# Altium PCB SBTech_IcarusBoard_1V0.PcbDoc (part 1 of 2)
Units mm, origin at the board's own origin, x right, y up, seen from the top; angles counter-clockwise.
Board outline 76.5 x 109.5 mm, 4 copper layers (Component Side, Ground Plane, Power Plane, Solder Side), stack 0.844 mm thick; 136 components, 92 nets, 463 pads, 332 vias.
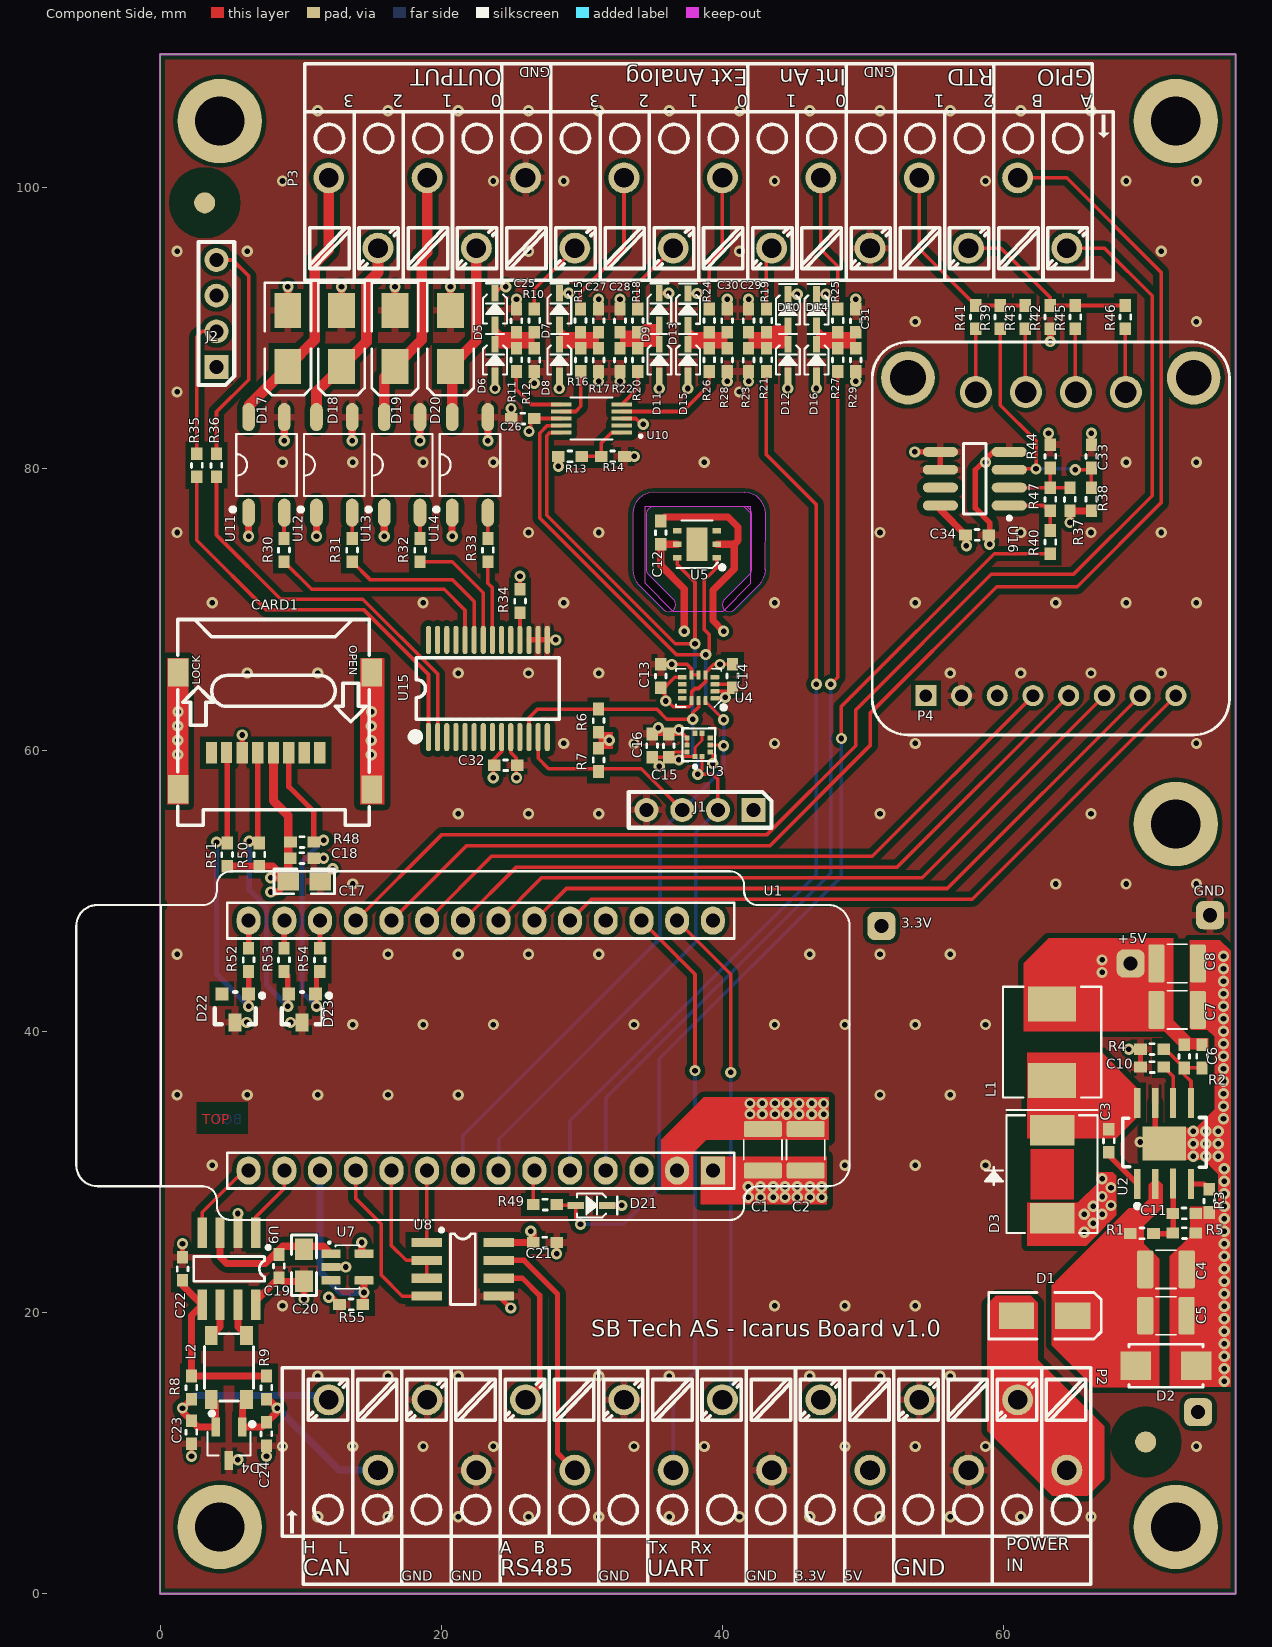
[diagram p0: Component Side view]
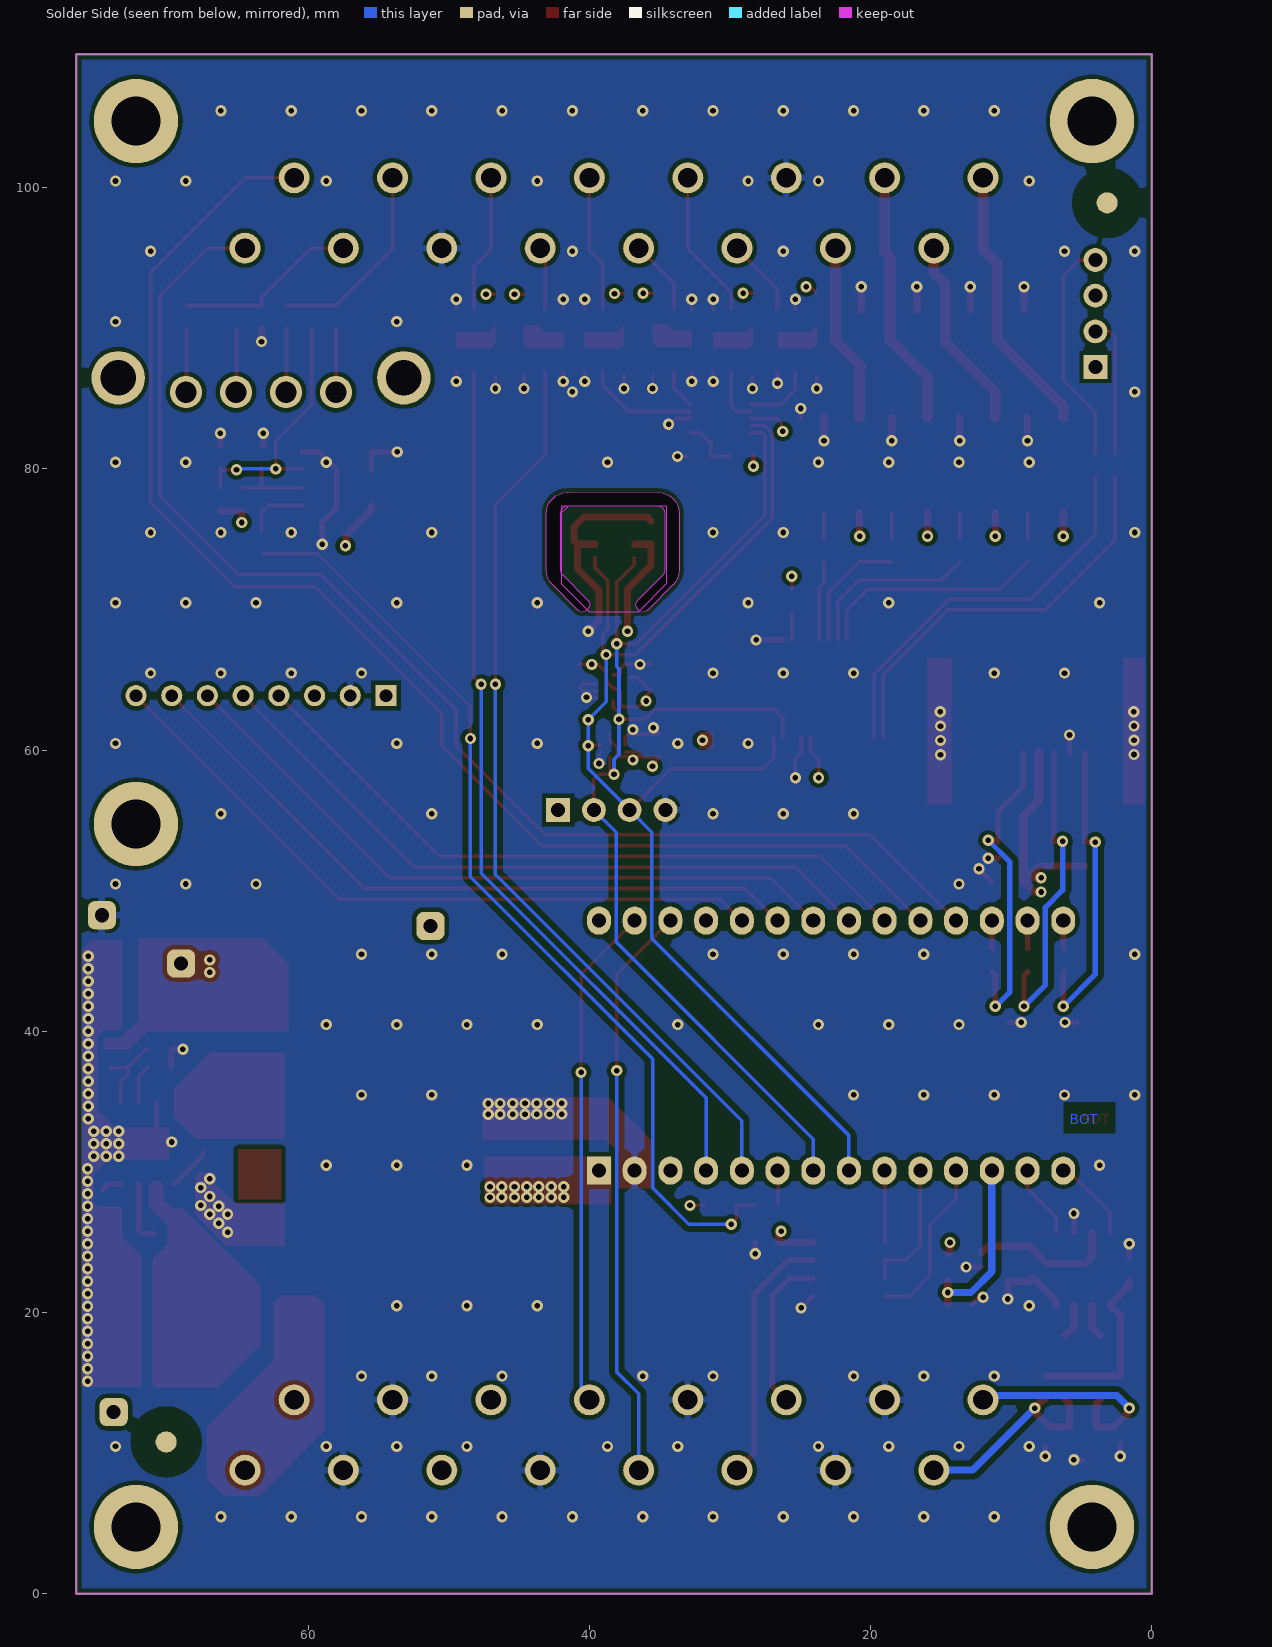
[diagram p1: Solder Side view, seen from below]
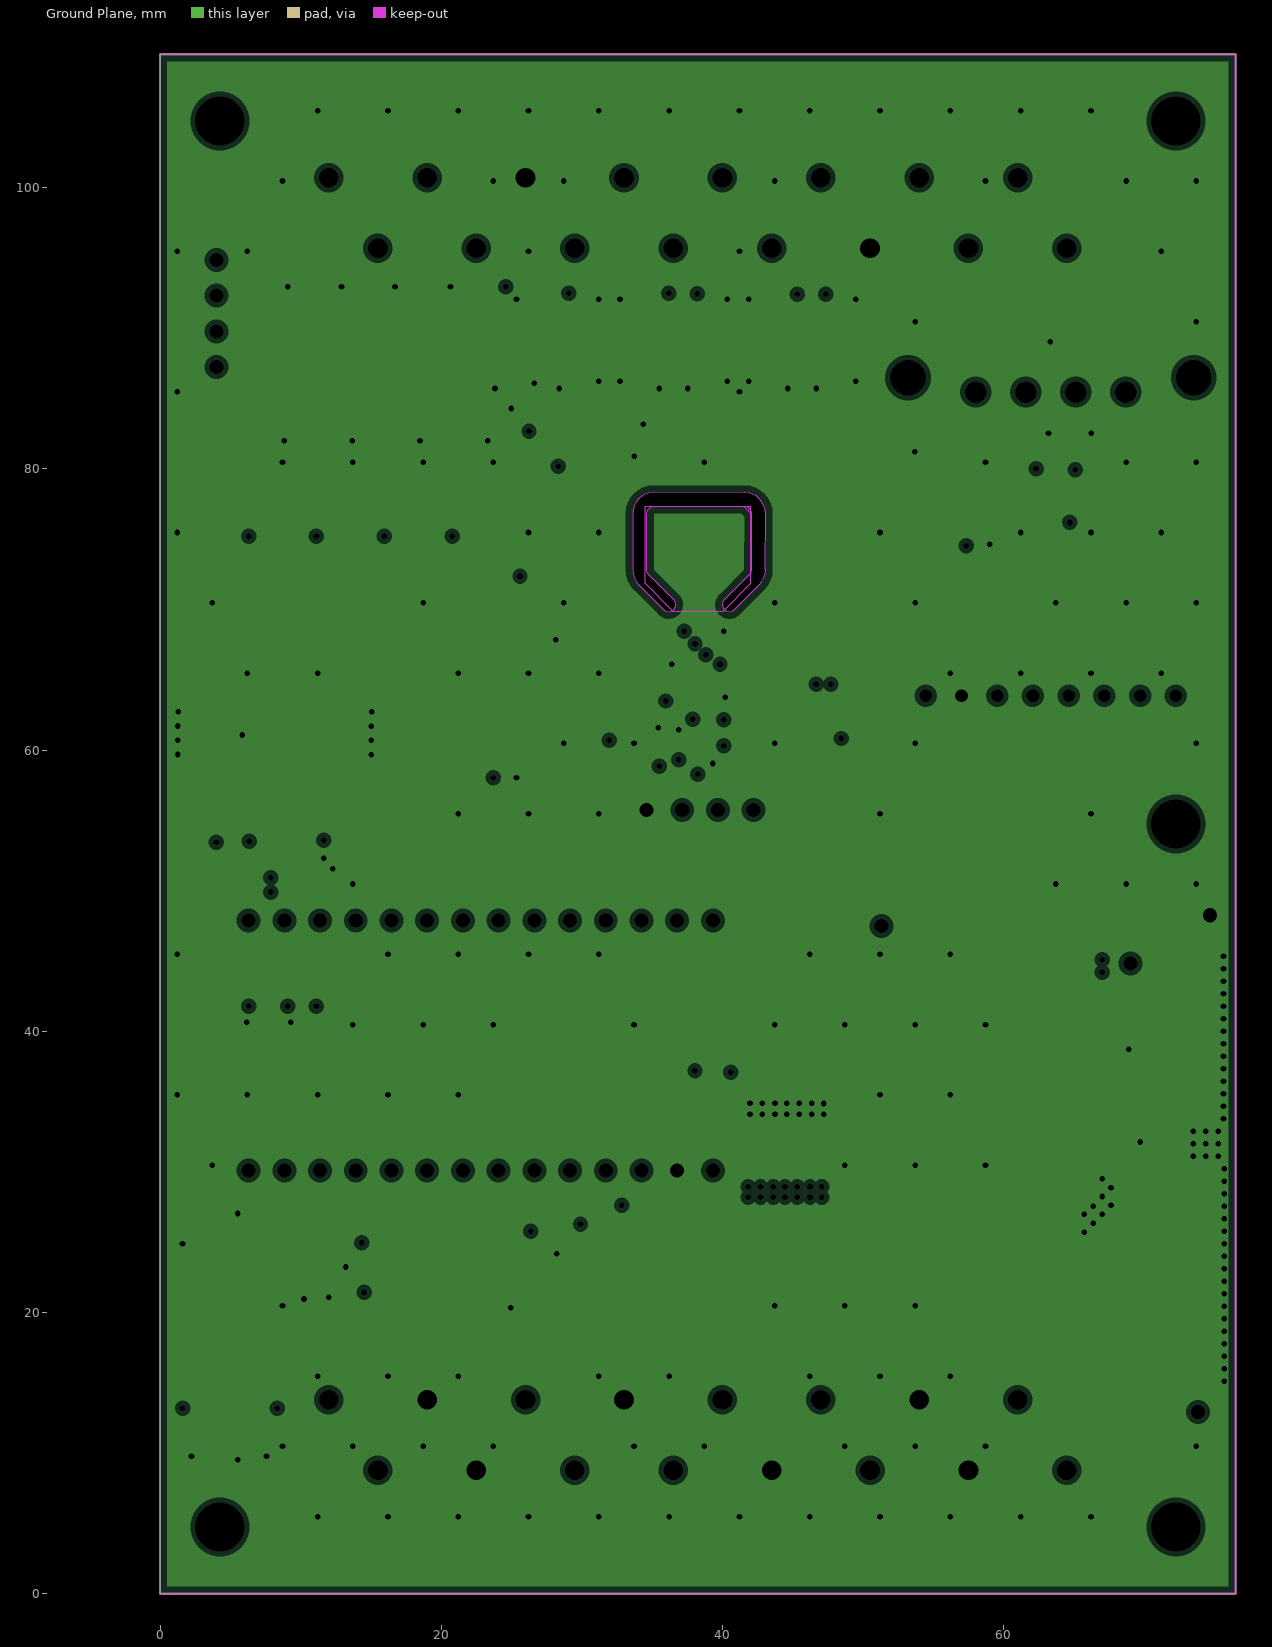
[diagram p2: Ground Plane, clearances drawn from the general rule]
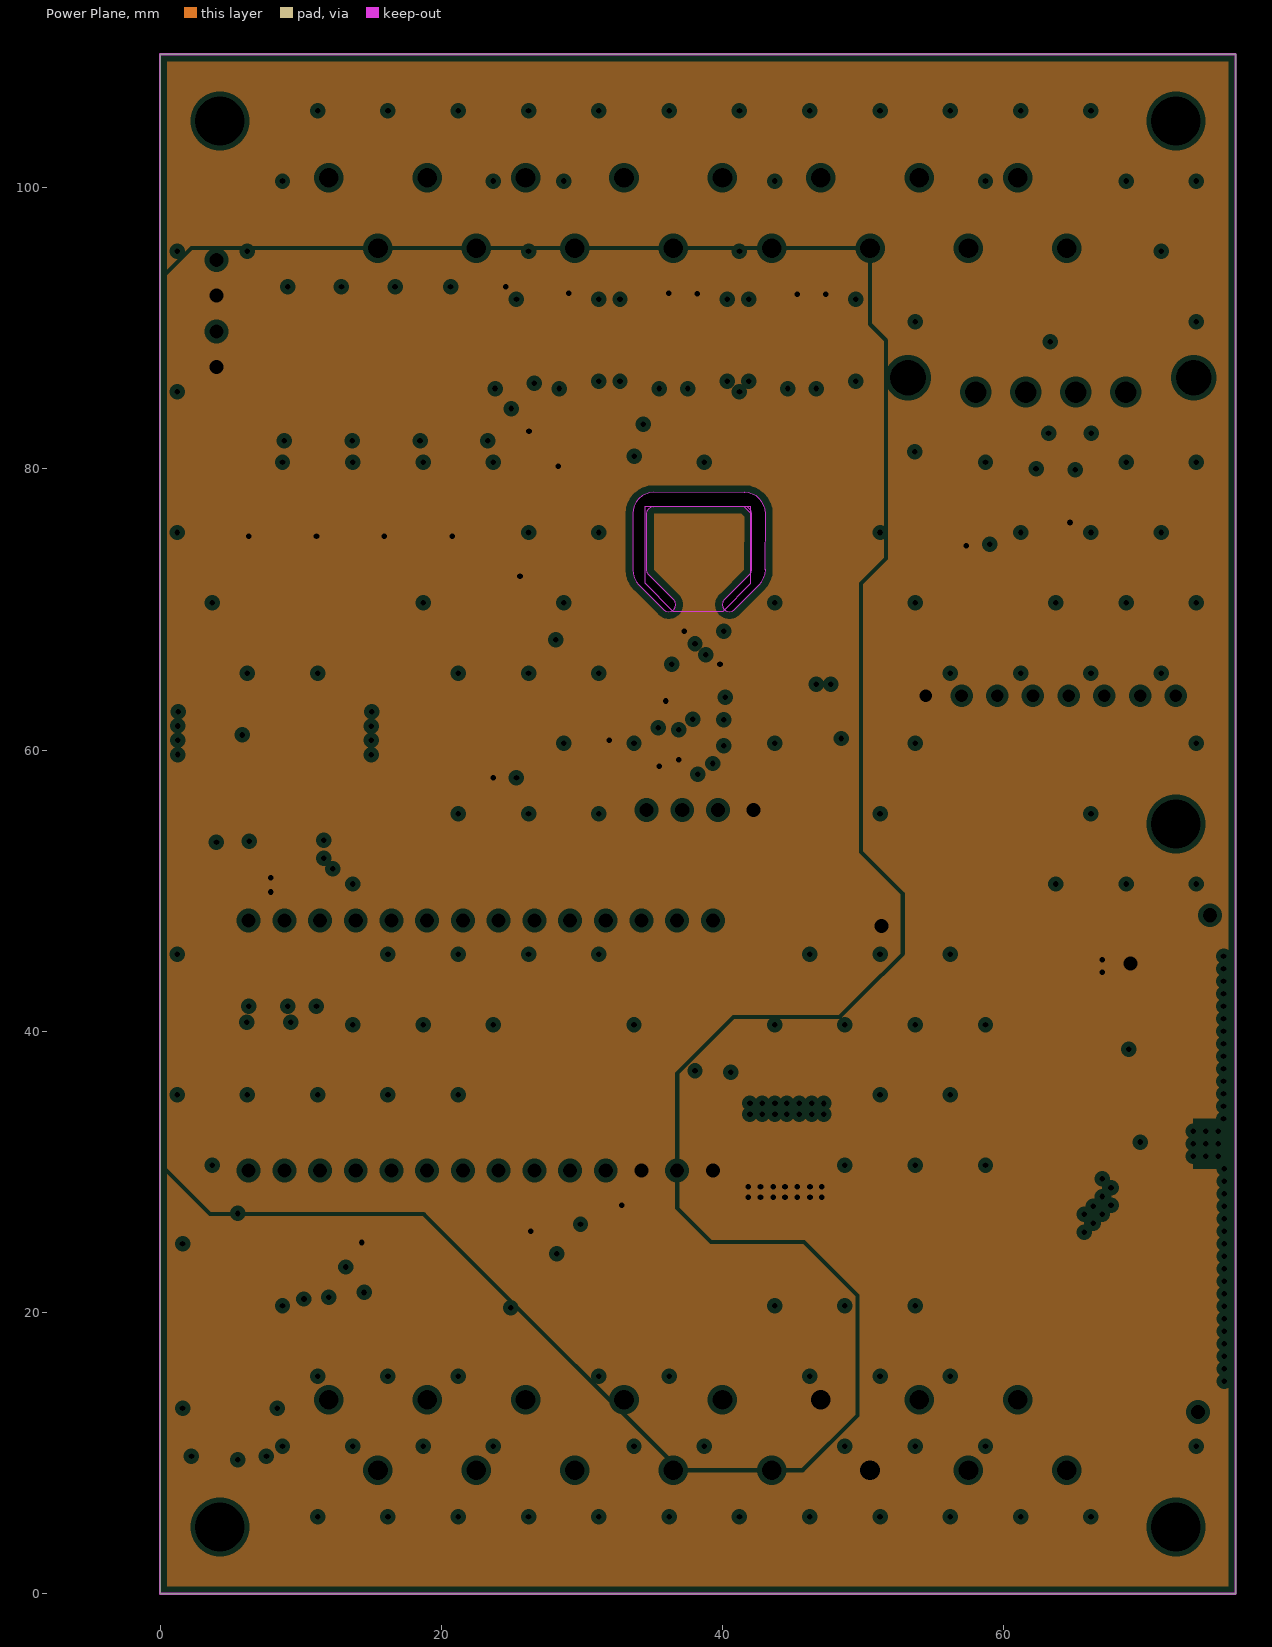
[diagram p3: Power Plane, clearances drawn from the general rule]
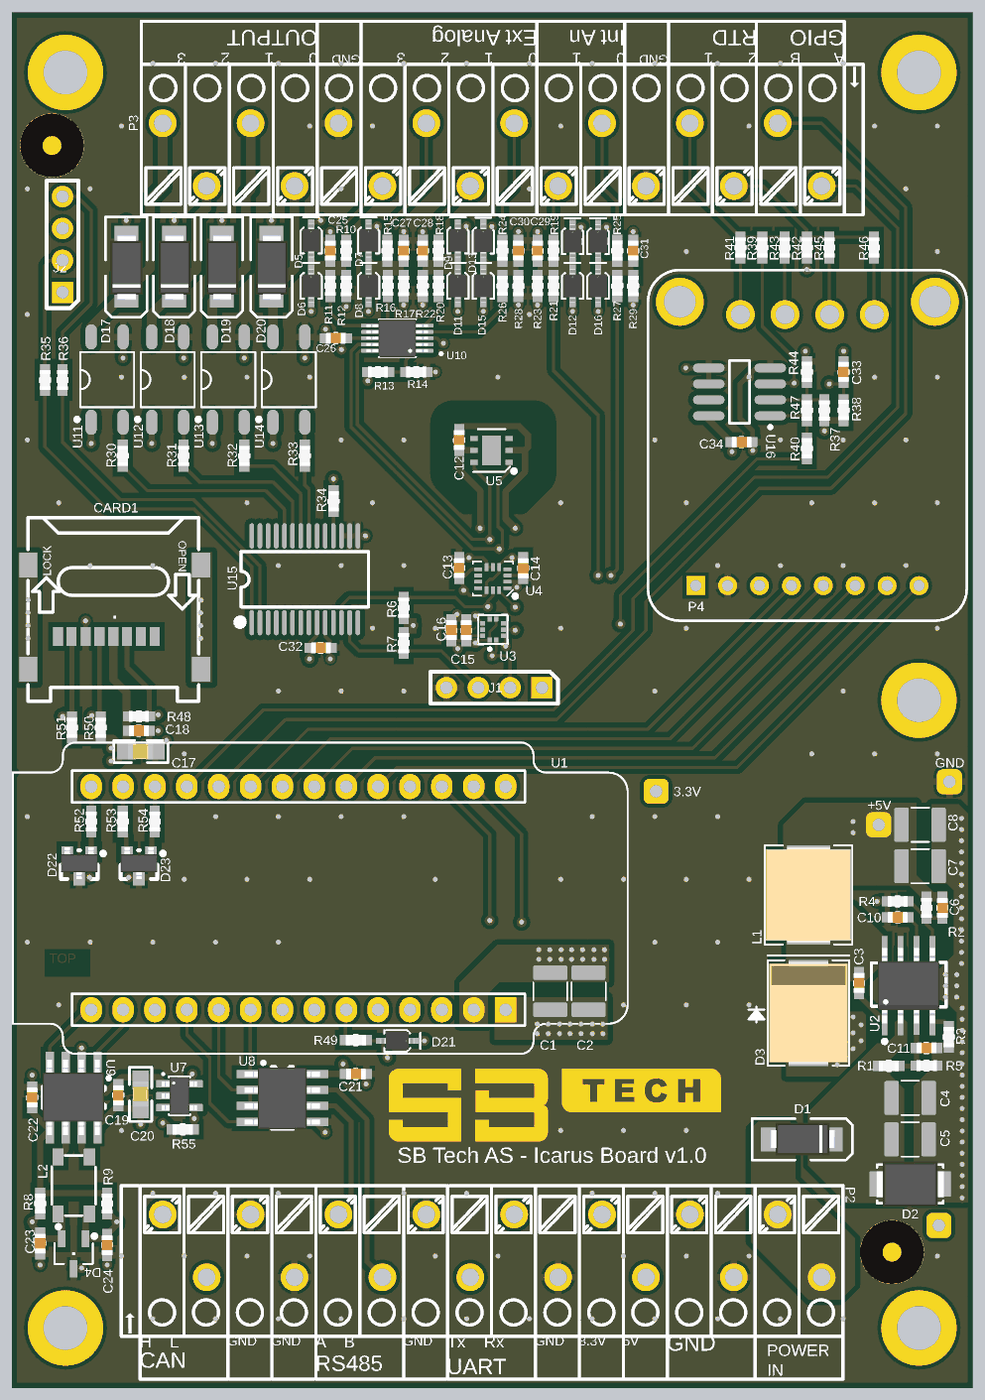
[diagram p5: 3D render of the assembled board from above, using the file's embedded part models]

## Layer stack, top to bottom
Top Solder: solder mask 0.0102, Solder Resist, Dk 3.5
Component Side: signal copper 0.0356
Dielectric 1: core 0.32, FR-4, Dk 4.8
Ground Plane: plane copper 0.036, net GND
Dielectric 3: prepreg 0.127, Dk 4.2
Power Plane: plane copper 0.036, net (Multiple Nets)
Dielectric 4: core 0.254, Dk 4.2
Solder Side: signal copper 0.0356
Bottom Solder: solder mask 0.0102, Solder Resist, Dk 3.5

## Board outline
0,0 0,109.5 76.5,109.5 76.5,0
cut-out: 41.558,77.337 41.753,77.298 41.919,77.187 42.029,77.022 42.068,76.827 42.058,72.827 42.068,72.827 42.029,72.632 41.919,72.466 41.912,72.473 40.144,70.705 40.137,70.712 40.027,70.547 39.988,70.352 40.027,70.157 40.137,69.991 40.302,69.881 40.498,69.842 40.693,69.881 40.858,69.991 42.619,71.766 42.624,71.761 42.811,71.989 42.951,72.25 43.037,72.533 43.065,72.827 43.058,72.827 43.065,76.827 43.037,77.121 42.951,77.404 42.811,77.664 42.624,77.893 42.396,78.08 42.135,78.219 41.852,78.305 41.558,78.334 41.558,78.327 35.119,78.334 34.825,78.305 34.542,78.219 34.282,78.08 34.053,77.893 33.866,77.664 33.726,77.403 33.641,77.121 33.612,76.827 33.619,76.827 33.619,72.827 33.612,72.827 33.641,72.533 33.726,72.25 33.866,71.989 34.053,71.761 34.058,71.766 35.826,69.998 35.819,69.991 35.984,69.881 36.18,69.842 36.375,69.881 36.54,69.991 36.651,70.157 36.689,70.352 36.651,70.547 36.54,70.712 36.533,70.705 34.765,72.473 34.758,72.466 34.648,72.632 34.609,72.827 34.619,72.827 34.619,76.827 34.609,76.827 34.648,77.022 34.758,77.187 34.924,77.298 35.119,77.337 35.119,77.327 41.558,77.337 41.753,77.298 41.919,77.187 42.029,77.022 42.068,76.827 41.558,77.327
cut-out: 41.558,77.337 41.753,77.298 41.919,77.187 42.029,77.022 42.068,76.827 42.058,72.827 42.068,72.827 42.029,72.632 41.919,72.466 41.912,72.473 40.144,70.705 40.137,70.712 40.027,70.547 39.988,70.352 40.027,70.157 40.137,69.991 40.302,69.881 40.498,69.842 40.693,69.881 40.858,69.991 42.619,71.766 42.624,71.761 42.811,71.989 42.951,72.25 43.037,72.533 43.065,72.827 43.058,72.827 43.065,76.827 43.037,77.121 42.951,77.404 42.811,77.664 42.624,77.893 42.396,78.08 42.135,78.219 41.852,78.305 41.558,78.334 41.558,78.327 35.119,78.334 34.825,78.305 34.542,78.219 34.282,78.08 34.053,77.893 33.866,77.664 33.726,77.403 33.641,77.121 33.612,76.827 33.619,76.827 33.619,72.827 33.612,72.827 33.641,72.533 33.726,72.25 33.866,71.989 34.053,71.761 34.058,71.766 35.826,69.998 35.819,69.991 35.984,69.881 36.18,69.842 36.375,69.881 36.54,69.991 36.651,70.157 36.689,70.352 36.651,70.547 36.54,70.712 36.533,70.705 34.765,72.473 34.758,72.466 34.648,72.632 34.609,72.827 34.619,72.827 34.619,76.827 34.609,76.827 34.648,77.022 34.758,77.187 34.924,77.298 35.119,77.337 35.119,77.327 41.558,77.337 41.753,77.298 41.919,77.187 42.029,77.022 42.068,76.827 41.558,77.327

## Design rules (kind name [scope] priority, off if disabled: settings)
Clearance Clearance_3 [(InPolygon AND InNet('GND')) vs OnLayer('Solder Side')] p1: gap=0.4 ignorepadtopadclearanceinfootprint=TRUE
Clearance Clearance_1 [(InPolygon AND InNet('GND')) vs OnLayer('Component Side')] p2: gap=0.4 ignorepadtopadclearanceinfootprint=TRUE
Clearance Clearance_2 [(InPolygon AND InNet('GND'))] p3: gap=0.3 ignorepadtopadclearanceinfootprint=TRUE
Clearance [All] p4: gap=0.2 ignorepadtopadclearanceinfootprint=FALSE except(0.15: SMDPad-SMDPad)
ComponentClearance ComponentClearance_1 [All] p1 off: gap=0.254 collisioncheckmode=3 verticalgap=0.254 showdistances=FALSE
ComponentClearance [All] p2 off: gap=0.254 collisioncheckmode=3 verticalgap=0.254 showdistances=FALSE
HoleSize [All] p1: absolutevalues=TRUE maxlimit=12.7 minlimit=0.025 maxpercent=80.000 minpercent=20.000
MatchedLengths DiffPair_MatchedLengths [All] p1 off: tolerance=25.4 checknetsindiffpair=TRUE checkdiffpairvsdiffpair=FALSE checkxsignals=FALSE checkothers=FALSE
MinimumSolderMaskSliver [All] p1 off: minsoldermaskwidth=0.025
PlaneClearance [All] p1: clearance=0.35
PlaneConnect PlaneConnect_1 [InNamedPolygon('TOP_GND')] p1: pad.planeconnectstyle=NoConnect pad.reliefexpansion=0.508 pad.reliefentries=4 pad.reliefconductorwidth=0.254 pad.reliefairgap=0.254 via.planeconnectstyle=Direct via.reliefexpansion=0.508 via.reliefentries=4 via.reliefconductorwidth=0.254 via.reliefairgap=0.254
PlaneConnect [All] p2: planeconnectstyle=Relief reliefexpansion=0.178 reliefentries=4 reliefconductorwidth=0.254 reliefairgap=0.178
PolygonConnect PolygonConnect_1 [InNamedPolygon('TOP_GND') vs (InPadClass('All Pads'))] p1: thpad.connectstyle=Relief thpad.reliefconductorwidth=0.508 thpad.reliefentries=4 thpad.polygonreliefangle="90 Angle" thpad.airgapwidth=0.254 smdpad.connectstyle=NoConnect smdpad.reliefconductorwidth=0.508 smdpad.reliefentries=4 smdpad.polygonreliefangle="90 Angle" smdpad.airgapwidth=0.254 via.connectstyle=Direct via.reliefconductorwidth=0.508 via.reliefentries=4 via.polygonreliefangle="90 Angle" via.airgapwidth=0.254
PolygonConnect [All] p2: thpad.connectstyle=Relief thpad.reliefconductorwidth=0.508 thpad.reliefentries=4 thpad.polygonreliefangle="90 Angle" thpad.airgapwidth=0.254 smdpad.connectstyle=Relief smdpad.reliefconductorwidth=0.508 smdpad.reliefentries=4 smdpad.polygonreliefangle="90 Angle" smdpad.airgapwidth=0.254 via.connectstyle=Direct via.reliefconductorwidth=0.508 via.reliefentries=4 via.polygonreliefangle="90 Angle" via.airgapwidth=0.254
RoutingVias [All] p1: holewidth=0.3 width=0.5 viastyle="Through Hole" minholewidth=0.2 minwidth=0.3 maxholewidth=1 maxwidth=1.5
SilkToSilkClearance [All] p1 off: silktosilkclearance=0.025
SilkToSolderMaskClearance SilkscreenOverComponentPads [IsPad] p1 off: minsilkscreentomaskgap=0.025 clearancetoexposedcopper=TRUE
SolderMaskExpansion [All] p1: expansion=0
ViasUnderSMD VIA_UnderSMD_2 [(Name = 'U17-11')] p1: allowed=FALSE
ViasUnderSMD VIA_UnderSMD_1 [(Name = 'U2-9')] p2: allowed=FALSE
Width [All] p1: maxlimit=5 minlimit=0.1 preferedwidth=0.254 minimp=50.000000 maximp=50.000000 favimp=50.000000
23 further rules are at their usual default settings.

## Classes and differential pairs
component class "01 - Walter_IO": C1 C2 J1 P2 P3 U1
component class "02 - Power": C3 C4 C5 C6 C7 C8 C10 C11 D1 D2 D3 L1 R1 R2 R3 R4 R5 U2
component class "03 - Sensors": C12 C13 C14 C15 C16 R6 R7 U3 U4 U5
component class "04 - Storage": C17 C18 CARD1 D22 D23 R48 R50 R51 R52 R53 R54
component class "05 - CAN_RS485": C19 C20 C21 C22 C23 C24 D4 L2 R8 R9 R55 U7 U8 U9
component class "06 - External ADC": C25 C26 C27 C28 C29 C30 C31 D5 D6 D7 D8 D9 D10 D11 D12 D13 D14 D15 D16 R10 R11 R12 R13 R14 R15 R16 R17 R18 R19 R20 R21 R22 R23 R24 R25 R26 R27 R28 R29 U10
component class "07 - Leds - OptoCoupler Input": C32 D17 D18 D19 D20 J2 R30 R31 R32 R33 R34 R35 R36 U11 U12 U13 U14 U15
component class "08 - RTD": C33 C34 D21 P4 R37 R38 R39 R40 R41 R42 R43 R44 R45 R46 R47 R49 U16

## Components (designator, comment, footprint, x,y, rotation, side; value= is the part's Value field where it differs from the comment)
C1 "100µF" C_1210_3225METRIC 42.876,31.572 r90 top
C2 "100µF" C_1210_3225METRIC 45.924,31.572 r90 top
C3 "100nF" CAP_0603 67.485,32.22 r90 top
C4 "4.7uF" C_1210_3225METRIC 71.549,23.076 r0 top value="4.7uF 100V"
C5 "4.7uF" C_1210_3225METRIC 71.544,19.774 r0 top value="4.7uF 100V"
C6 "390pF" CAP_0603 74.118,38.225 r270 top
C7 "100µF" C_1210_3225METRIC 72.34,41.527 r0 top
C8 "100µF" C_1210_3225METRIC 72.34,44.829 r0 top
C10 "100nF" CAP_0603 70.562,37.463 r180 top
C11 "100nF" CAP_0603 72.848,27.049 r0 top
C12 "100nF" CAP_0603 35.612,75.474 r90 top
C13 "100nF" CAP_0603 35.612,65.276 r90 top
C14 "100nF" CAP_0603 40.717,65.276 r270 top
C15 "100nF" CAP_0603 36.183,60.323 r90 top
C16 "100nF" CAP_0603 35.002,60.323 r90 top
C17 "10uF" CAP_0805 10.26,50.671 r0 top
C18 "100nF" CAP_0603 10.097,52.322 r0 top
C19 "100nF" CAP_0603 8.459,23.303 r270 top
C20 "10uF" CAP_0805 10.237,23.366 r270 top
C21 "100nF" CAP_0603 27.382,24.981 r0 top
C22 "4700pF" CAP_0603 1.601,23.112 r90 top
C23 "18pF" CAP_0603 2.236,11.492 r270 top
C24 "18pF" CAP_0603 7.57,11.365 r270 top
C25 "100nF" CAP_0603 25.35,90.549 r90 top
C26 "100nF" CAP_0603 25.794,83.59 r180 top
C27 "100nF" CAP_0603 31.192,90.549 r90 top
C28 "100nF" CAP_0603 32.716,90.549 r90 top
C29 "100nF" CAP_0603 41.86,90.549 r90 top
C30 "100nF" CAP_0603 40.336,90.549 r90 top
C31 "100nF" CAP_0603 49.48,90.549 r90 top
C32 "100nF" CAP_0603 24.588,58.926 r0 top
C33 "100nF" CAP_0603 66.244,80.897 r90 top
C34 "100nF" CAP_0603 58.116,75.309 r0 top
CARD1 "TF-002X-H18" SIM-SMD_TF-002-H18 8.167,61.369 r180 top
D1 "DIODE SCHOTTKY 100V 5A DO214AC" S1M-13-F 62.913,19.774 r180 top value=SS510
D2 "SMBJ54CA-HT" SMBJ54CA-HT 71.549,16.218 r180 top value=54V
D3 "B560C-13-F" SMC_DIO 63.45,29.843 r270 top
D4 "ESDCAN01-2BLY" SOT95P255X150-3N 4.903,10.666 r90 top
D5 "1N4148" SOD323_STM_NW 23.826,91.374 r270 top
D6 "1N4148" SOD323_STM_NW 23.826,87.755 r270 top
D7 "1N4148" SOD323_STM_NW 28.398,91.374 r270 top
D8 "1N4148" SOD323_STM_NW 28.398,87.755 r270 top
D9 "1N4148" SOD323_STM_NW 35.51,91.374 r270 top
D10 "1N4148" SOD323_STM_NW 44.654,91.311 r270 top
D11 "1N4148" SOD323_STM_NW 35.51,87.755 r270 top
D12 "1N4148" SOD323_STM_NW 44.654,87.755 r270 top
D13 "1N4148" SOD323_STM_NW 37.542,91.357 r270 top
D14 "1N4148" SOD323_STM_NW 46.686,91.311 r270 top
D15 "1N4148" SOD323_STM_NW 37.542,87.755 r270 top
D16 "1N4148" SOD323_STM_NW 46.686,87.755 r270 top
D17 "DIODE SCHOTTKY 100V 5A DO214AC" S1M-13-F 9.094,89.279 r90 top value=SS510
D18 "DIODE SCHOTTKY 100V 5A DO214AC" S1M-13-F 12.904,89.279 r90 top value=SS510
D19 "DIODE SCHOTTKY 100V 5A DO214AC" S1M-13-F 16.714,89.279 r90 top value=SS510
D20 "DIODE SCHOTTKY 100V 5A DO214AC" S1M-13-F 20.662,89.279 r90 top value=SS510
D21 "1N4148" SOD323_STM_NW 30.684,27.621 r180 top
D22 "Q100 TO CATALOG SPIN OF TPD2E2U0" TPD2E2U06DCKR 5.347,41.654 r90 top value=5V
D23 "Q100 TO CATALOG SPIN OF TPD2E2U0" TPD2E2U06DCKR 10.11,41.654 r90 top value=5V
J1 "Conn_01x04_Male" PINHEADER_1X04_P2.54MM_VERTICAL 42.221,55.751 r180 top
J2 "Conn_01x04_Male" PINHEADER_1X04_P2.54MM_VERTICAL 4.014,87.247 r90 top
L1 "6.8uH 4.5A" IHLP2525CZER6R8M01 63.45,39.241 r90 top
L2 "ACT45B-510-2P-TL003" ACT45B1012PTL003 4.903,16.091 r90 top
P2 "Terminal 16" CONN-TH_250-216 38.25,11.291 r0 top
P3 "Terminal 16" CONN-TH_250-216 38.25,98.209 r180 top
P4 "DNP" MAX31865_BOARD 63.358,75.182 r0 top locked value=MAX31865_board
R1 "68K" RES_0603 69.839,25.627 r180 top
R2 "68K" RES_0603 72.848,38.225 r90 top
R3 "45.3K" RES_0603 74.626,27.938 r90 top
R4 "12K" RES_0603 70.562,38.733 r0 top
R5 "DNP" RES_0603 72.848,25.652 r180 top
R6 "45.3K" RES_0603 31.192,62.101 r270 top
R7 "45.3K" RES_0603 31.192,59.307 r90 top
R8 "60.4Ω" RES_0603 2.236,14.667 r90 top value=60.4?
R9 "60.4Ω" RES_0603 7.57,14.667 r90 top value=60.4?
R10 "5K1 1%" RES_0603 26.62,90.549 r270 top value=5K1
R11 "200R %5" RES_0603 25.35,87.755 r270 top value=200R
R12 "10K 1%" RES_0603 26.62,87.755 r90 top value=10K
R13 "DNP" RES_0603 29.16,80.897 r0 top
R14 "0R" RES_0603 32.208,80.897 r0 top
R15 "5K1 1%" RES_0603 29.906,90.549 r270 top value=5K1
R16 "200R %5" RES_0603 29.922,87.755 r270 top value=200R
R17 "10K 1%" RES_0603 31.192,87.755 r90 top value=10K
R18 "5K1 1%" RES_0603 33.978,90.549 r270 top value=5K1
R19 "5K1 1%" RES_0603 43.13,90.549 r270 top value=5K1
R20 "200R %5" RES_0603 33.978,87.755 r270 top value=200R
R21 "200R %5" RES_0603 43.13,87.755 r270 top value=200R
R22 "10K 1%" RES_0603 32.716,87.755 r90 top value=10K
R23 "10K 1%" RES_0603 41.86,87.755 r90 top value=10K
R24 "5K1 1%" RES_0603 39.066,90.549 r270 top value=5K1
R25 "5K1 1%" RES_0603 48.21,90.549 r270 top value=5K1
R26 "200R %5" RES_0603 39.066,87.755 r270 top value=200R
R27 "200R %5" RES_0603 48.21,87.755 r270 top value=200R
R28 "10K 1%" RES_0603 40.336,87.755 r90 top value=10K
R29 "10K 1%" RES_0603 49.48,87.755 r90 top value=10K
R30 "200R %5" RES_0603 8.817,74.23 r90 top value=200R
R31 "200R %5" RES_0603 13.666,74.23 r90 top value=200R
R32 "200R %5" RES_0603 18.492,74.23 r90 top value=200R
R33 "200R %5" RES_0603 23.318,74.23 r90 top value=200R
R34 "10K 1%" RES_0603 25.604,70.61 r90 top value=10K
R35 "200R %5" RES_0603 2.617,80.262 r90 top value=200R
R36 "200R %5" RES_0603 4.014,80.262 r90 top value=200R
R37 "60.4Ω" RES_0603 64.72,77.849 r90 top value=6K8
R38 "10K 1%" RES_0603 66.244,77.849 r270 top value=10K
R39 "0R" RES_0603 59.767,90.803 r270 top
R40 "200R %5" RES_0603 63.323,74.801 r270 top value=200R
R41 "DNP" RES_0603 58.024,90.803 r270 top
R42 "0R" RES_0603 63.323,90.803 r270 top
R43 "DNP" RES_0603 61.545,90.803 r270 top
R44 "10K 1%" RES_0603 63.323,80.897 r270 top value=10K
R45 "DNP" RES_0603 65.101,90.803 r270 top
R46 "DNP" RES_0603 68.657,90.803 r270 top
R47 "10K 1%" RES_0603 63.323,77.849 r90 top value=10K
R48 "10K 1%" RES_0603 10.11,53.465 r0 top value=10K
R49 "200R %5" RES_0603 27.382,27.684 r180 top value=200R
R50 "10K 1%" RES_0603 7.062,52.576 r90 top value=10K
R51 "10K 1%" RES_0603 4.776,52.576 r90 top value=10K
R52 "33R" RES_0603 6.3,45.083 r270 top
R53 "33R" RES_0603 8.817,45.083 r270 top
R54 "33R" RES_0603 11.36,45.083 r270 top
R55 "10K 1%" RES_0603 13.589,20.574 r180 top value=10K
U1 "DNP" WALTER-SOCKET 22.81,38.987 r270 top value=DPT_Walter
U2 "LMR16030PDDAR" LMR16030PDDAR 71.417,32.022 r0 top
U3 "LPS22HH" HLGA10_2X2_STM-L 38.304,60.374 r90 top value=LPS22HBTR
U4 "LSM6DSM" LGA-14_3X2.5MM_P0.5MM_LAYOUTBORDER3X4Y 38.304,64.438 r180 top
U5 "HDC1080DMBR" TEXAS_PWSON-N6 38.202,74.649 r180 top
U7 "SY6288CAAC" SOT95P285X145-5N 13.335,23.241 r180 top
U8 "THVD1450D" SOIC127P600 21.54,23.076 r270 top
U9 "SN65HVDA1050AQDRQ1" SOIC127P600 4.903,23.112 r180 top
U10 "ADS1115IDGSR" SOP50P490X110-10N 30.684,83.59 r90 top
U11 "GAQY212GSX" SOP-4_L4.3-W4.4-P2.54-LS6.8-TR 7.57,80.291 r180 top
U12 "GAQY212GSX" SOP-4_L4.3-W4.4-P2.54-LS6.8-TR 12.396,80.291 r180 top
U13 "GAQY212GSX" SOP-4_L4.3-W4.4-P2.54-LS6.8-TR 17.222,80.291 r180 top
U14 "GAQY212GSX" SOP-4_L4.3-W4.4-P2.54-LS6.8-TR 22.048,80.291 r180 top
U15 "MCP23017T-E/SS" SSOP-28_L10.2-W5.3-P0.65-LS7.8-BL 23.318,64.387 r0 top
U16 "LM358AD" SO8_M 57.952,79.309 r90 top
? "Comment" FIDUCIAL_ROUND 70.104,10.795 r90 top
? "Comment" FIDUCIAL_ROUND 3.175,98.933 r90 top

## Footprints (in the part's own frame and the unit in brackets; to place one, negate y for a bottom-side part, rotate by r counter-clockwise, add the part's x,y. Pads: shape width x height; smd on the part's side, far side on the other; paste and mask are expansions set on the pad)
ACT45B1012PTL003 [mm]
  rect 1.35x0.9 smd mask+0: 1(-2.275,1.25) 2(-2.275,-1.25) 3(2.275,-1.25) 4(2.275,1.25)
  silkscreen extent -3.42,-1.75 2.4,1.75
C_1210_3225METRIC [mm]
  rrect22% 1.15x2.7 smd mask+0: 1(-1.475,0) 2(1.475,0)
  silkscreen extent -0.71,-1.36 0.71,1.36
CAP_0603 [mm]
  rect 0.9x0.8 smd: 1(-0.826,0) 2(0.826,0)
  silkscreen extent -0.15,-0.38 0.14,0.38, body extent -0.79,-0.43 0.81,0.44, height 0.8
CAP_0805 [mil]
  rect 60x50 smd: 1(-45,0) 2(45,0)
  silkscreen extent -85,-35 85,35, body extent -40,-25 39,25, height 49
CONN-TH_250-216 [mm]
  round 2.2 hole 1.4: 1(26.25,-2.5) 3(19.25,-2.5) 5(12.25,-2.5) 7(5.25,-2.5) 9(-1.75,-2.5) 11(-8.75,-2.5) 15(-22.75,-2.5)
  round 2.2 hole 1.4 copper offset 0,0: 2(22.75,2.5) 4(15.75,2.5) 6(8.75,2.5) 8(1.75,2.5) 10(-5.25,2.5) 12(-12.25,2.5) 13(-15.75,-2.5) 14(-19.25,2.5) 16(-26.25,2.5)
  silkscreen extent -29.55,-7.2 27.95,4.8
FIDUCIAL_ROUND [mm]
  round 1.5 all layers, no hole mask+1.8: 1(0,0)
  Component Side pour cut-out: 0,-2.533 -0.494,-2.484 -0.969,-2.34 -1.407,-2.106 -1.791,-1.791 -2.106,-1.407 -2.34,-0.969 -2.484,-0.494 -2.533,0 -2.484,0.494 -2.34,0.969 -2.106,1.407 -1.791,1.791 -1.407,2.106 -0.969,2.34 -0.494,2.484 0,2.533 0.494,2.484 0.969,2.34 1.407,2.106 1.791,1.791 2.106,1.407 2.34,0.969 2.484,0.494 2.533,0 2.484,-0.494 2.34,-0.969 2.106,-1.407 1.791,-1.791 1.407,-2.106 0.969,-2.34 0.494,-2.484
  Solder Side pour cut-out: 0.005,-2.534 -0.489,-2.485 -0.965,-2.341 -1.402,-2.107 -1.786,-1.792 -2.101,-1.408 -2.335,-0.97 -2.48,-0.495 -2.528,-0.001 -2.48,0.494 -2.335,0.969 -2.101,1.407 -1.786,1.79 -1.402,2.106 -0.965,2.34 -0.489,2.484 0.005,2.532 0.499,2.484 0.974,2.34 1.412,2.106 1.796,1.79 2.111,1.407 2.345,0.969 2.489,0.494 2.538,-0.001 2.489,-0.495 2.345,-0.97 2.111,-1.408 1.796,-1.792 1.412,-2.107 0.974,-2.341 0.499,-2.485
HLGA10_2X2_STM-L [mm]
  rect 0.377x0.348 smd mask+0: 1(-0.828,0.25) 2(-0.828,-0.25) 6(0.828,-0.25) 7(0.828,0.25)
  rect 0.348x0.377 smd mask+0: 3(-0.5,-0.828) 4(0,-0.828) 5(0.5,-0.828) 8(0.5,0.828) 9(0,0.828) 10(-0.5,0.828)
  silkscreen extent -1.65,-1.18 1.18,1.18
IHLP2525CZER6R8M01 [mil]
  rect 98x135 smd: 1(-107,0) 2(107,0)
  silkscreen extent -155,-138 155,138, body extent -150,-133 150,133, height 118
LGA-14_3X2.5MM_P0.5MM_LAYOUTBORDER3X4Y [mm]
  rrect25% 0.625x0.3 smd mask+0: 1(-1.162,0.75) 2(-1.162,0.25) 3(-1.162,-0.25) 4(-1.162,-0.75) 8(1.162,-0.75) 9(1.162,-0.25) 10(1.162,0.25) 11(1.162,0.75)
  rrect25% 0.3x0.625 smd mask+0: 5(-0.5,-0.913) 6(0,-0.913) 7(0.5,-0.913) 12(0.5,0.913) 13(0,0.913) 14(-0.5,0.913)
  silkscreen extent -1.93,-1.36 1.61,1.55
LMR16030PDDAR [mm]
  rect 0.45x2.15 smd: 1(-1.905,-2.875) 2(-0.635,-2.875) 3(0.635,-2.85) 4(1.905,-2.875) 5(1.905,2.875) 6(0.635,2.875) 7(-0.635,2.875) 8(-1.905,2.875)
  rect 3.1x2.4 smd: 9(-0.005,0)
  silkscreen extent -2.96,-4.59 2.99,1.85, body extent -2.45,-3 2.45,3, height 1.7
MAX31865_BOARD [mil] "Connector; Header; 8 Position"
  rect 59.06x59.06 hole 35.43: 1(-350,-445)
  round 59.06 hole 35.43: 2(-250,-445) 3(-150,-445) 4(-50,-445) 5(50,-445) 6(150,-445) 7(250,-445) 8(350,-445)
  round 150 hole 100: 9(400,445) 14(-400,445)
  round 90 hole 60: 10(210,405) 11(70,405) 12(-70,405) 13(-210,405)
  silkscreen extent -500,-555 500,545
PINHEADER_1X04_P2.54MM_VERTICAL [mm]
  rect 1.7x1.7 hole 1 paste-2539.97 mask+0: 1(0,0)
  rrect100% 1.7x1.7 hole 1 paste-2539.97 mask+0: 2(2.54,0) 3(5.08,0) 4(7.62,0)
  silkscreen extent -1.27,-1.27 8.89,1.27
RES_0603 [mm]
  rect 0.9x0.8 smd: 1(-0.826,0) 2(0.826,0)
  silkscreen extent -0.15,-0.38 0.14,0.38, body extent -0.81,-0.43 0.79,0.43, height 0.5
S1M-13-F [mm]
  rect 2.5x1.9 smd: 1(-2,0) 2(2,0)
  silkscreen extent -4.03,-1.65 3.97,1.65, body extent -2.67,-1.33 2.52,1.28, height 2.4
SIM-SMD_TF-002-H18 [mm]
  rect 0.8x1.5 smd: 1(-3.194,1.554) 2(-2.094,1.554) 3(-0.993,1.554) 4(0.105,1.554) 5(1.208,1.554) 6(2.311,1.554) 7(3.431,1.546) 8(4.514,1.554)
  rect 1.45x2 smd: 9(6.88,4.146) 10(-6.88,4.154) 11(-6.88,-4.154) 12(6.88,-4.154)
  rect 0.2x0.2 on Top Overlay: C(0,0)
  silkscreen extent -6.7,-7.93 6.9,6.7
SMBJ54CA-HT [mm]
  rect 2.17x2 smd: 1(-2.155,0) 2(2.155,0)
  silkscreen extent -2.64,-1.53 2.64,1.53, body extent -2.7,-1.79 2.69,1.84, height 2.6
SMC_DIO [mm]
  rect 2.18x3.18 smd paste+0 mask+0: 1(-3.127,0) 2(3.127,0)
  Component Side region: -1.778,-1.524 -1.778,1.524 1.778,1.524 1.778,-1.524
  silkscreen extent -4.57,-4.78 4.19,3.24, body extent -4.07,-3.11 4.07,3.11, height 2.45
SO8_M [mm] "SOIC, 8-Leads, Body 4.9x3.9mm, Pitch 1.27mm, IPC Low Density"
  oval 0.7x2.5 smd: 1(-1.905,-2.45) 2(-0.635,-2.45) 3(0.635,-2.45) 4(1.905,-2.45) 5(1.905,2.45) 6(0.635,2.45) 7(-0.635,2.45) 8(-1.905,2.45)
  silkscreen extent -2.93,-2.58 2.5,0.8, body extent -2.5,-2 2.5,2, height 1.75
SOD323_STM_NW [mil]
  rect 45.56x19.36 smd paste+0 mask+0: 1(-44,0) 2(44,0)
  silkscreen extent -72,-34 41,34, body extent -53,-29 53,29, height 46
SOIC127P600 [mm]
  rect 0.65x2.17 smd: 1(-1.905,-2.565) 2(-0.635,-2.565) 3(0.635,-2.565) 4(1.905,-2.565) 5(1.905,2.565) 6(0.635,2.565) 7(-0.635,2.565) 8(-1.905,2.565)
  silkscreen extent -2.92,-1.65 2.5,0.88, body extent -2.43,-3.01 2.47,2.99, height 1.75
SOP50P490X110-10N [mm]
  rrect25% 0.28x1.47 smd: 1(-1,-2.15) 2(-0.5,-2.15) 3(0,-2.15) 4(0.5,-2.15) 5(1,-2.15) 6(1,2.15) 7(0.5,2.15) 8(0,2.15) 9(-0.5,2.15) 10(-1,2.15)
  silkscreen extent -1.5,-3.6 1.5,1.5, body extent -1.5,-2.45 1.5,2.45, height 1.1
SOP-4_L4.3-W4.4-P2.54-LS6.8-TR [mm]
  oval 0.9x2 smd: 1(1.27,3.4) 2(-1.27,3.4) 3(-1.27,-3.4) 4(1.27,-3.4)
  silkscreen extent -2.15,-2.2 2.54,3.32
SOT95P255X150-3N [mm]
  rect 1.35x0.6 smd mask+0: 1(1.2,-0.95) 2(1.2,0.95) 3(-1.2,0)
  rrect50% 0.254x0.254 on Top Overlay: 9(0,0)
  silkscreen extent -0.82,-1.8 1.55,1.53
SOT95P285X145-5N [mm]
  rrect15% 1.37x0.59 smd: 1(1.175,-0.95) 2(1.175,0) 3(1.175,0.95) 4(-1.175,0.95) 5(-1.175,-0.95)
  silkscreen extent -0.85,-1.8 1.36,1.55, body extent -1.4,-1.5 1.4,1.5, height 1.4
SSOP-28_L10.2-W5.3-P0.65-LS7.8-BL [mm]
  oval 0.364x2.015 smd: 1(-4.225,-3.455) 2(-3.575,-3.455) 3(-2.925,-3.455) 4(-2.275,-3.455) 5(-1.625,-3.455) 6(-0.975,-3.455) 7(-0.325,-3.455) 8(0.325,-3.455) 9(0.975,-3.455) 10(1.625,-3.455) 11(2.275,-3.455) 12(2.925,-3.455) 13(3.575,-3.455) 14(4.225,-3.455) 15(4.225,3.455) 16(3.575,3.455) 17(2.925,3.455) 18(2.275,3.455) 19(1.625,3.455) 20(0.975,3.455) 21(0.325,3.455) 22(-0.325,3.455) 23(-0.975,3.455) 24(-1.625,3.455) 25(-2.275,3.455) 26(-2.925,3.455) 27(-3.575,3.455) 28(-4.225,3.455)
  silkscreen extent -5.69,-3.95 5.08,2.2
TEXAS_PWSON-N6 [mm]
  rect 0.6x0.4 smd mask+0: 1(-1.4,0.95) 2(-1.4,0) 3(-1.4,-0.95) 4(1.4,-0.95) 5(1.4,0) 6(1.4,0.95)
  rect 1.5x2.4 smd mask+0: 7(0,0)
  silkscreen extent -1.93,-1.7 1.48,1.8
TPD2E2U06DCKR [mil]
  rect 36x36 smd: 1(40,-37.5) 2(40,37.5)
  rect 50x36 smd: 3(-40,0.5)
  rrect50% 10x10 on Top Overlay: 10(0,0)
  silkscreen extent -45,-81 45,58, body extent -45,-58 54,57, height 44
WALTER-SOCKET [mm]
  oval 2x1.7 hole 1 paste-2539.97 mask+0: 1(-8.89,16.51) 2(-8.89,13.97) 3(-8.89,11.43) 4(-8.89,8.89) 5(-8.89,6.35) 6(-8.89,3.81) 7(-8.89,1.27) 8(-8.89,-1.27) 9(-8.89,-3.81) 10(-8.89,-6.35) 11(-8.89,-8.89) 12(-8.89,-11.43) 13(-8.89,-13.97) 14(-8.89,-16.51) 15(8.89,-16.51) 16(8.89,-13.97) 17(8.89,-11.43) 18(8.89,-8.89) 19(8.89,-6.35) 20(8.89,-3.81) 21(8.89,-1.27) 22(8.89,1.27) 23(8.89,3.81) 24(8.89,6.35) 25(8.89,8.89) 26(8.89,11.43) 27(8.89,13.97)
  rect 2x1.7 hole 1 paste-2539.97 mask+0: 28(8.89,16.51)
  silkscreen extent -12.4,-28.77 12.4,26.23

## Part data
C1 C2 C7 C8: library part C, "6.3V 100uF X5R ±20% 1210 Multilayer Ceramic Capacitors MLCC - SMD/SMT ROHS", JLCPCB=C49066, lcsc link=https://www.lcsc.com/product-detail/Multilayer-Ceramic-Capacitors-MLCC-SMD-SMT_Samsung-Electro-Mechanics-CL32A107MQVNNNE_C49066.html?s_z=n_C49066, LCSC PART=C49066
C3 C10 C11 C12 C13 C14 C15 C16 C18 C19 C21 C25 C26 C27 C28 C29 C30 C31 C32 C33 C34: library part C, JLCPCB=C6119867, lcsc link=https://www.lcsc.com/product-detail/Multilayer-Ceramic-Capacitors-MLCC-SMD-SMT_HRE-CGA0603X7R104K500JT_C6119867.html?s_z=n_100nF, LCSC PART=C6119867, pdf=https://www.lcsc.com/datasheet/lcsc_datasheet_2501031500_HRE-CGA0603X7R104K500JT_C6119867.pdf
C4 C5: library part C, JLCPCB=C381466, lcsc link=https://www.lcsc.com/product-detail/Multilayer-Ceramic-Capacitors-MLCC-SMD-SMT_PSA-Prosperity-Dielectrics-FS32X475K101EGG_C381466.html, LCSC PART=C381466
C6: library part C, "50V 390pF X7R ±10% 0603 Multilayer Ceramic Capacitors MLCC - SMD/SMT ROHS", JLCPCB=C1617, lcsc link=https://www.lcsc.com/product-detail/Multilayer-Ceramic-Capacitors-MLCC-SMD-SMT_FH-Guangdong-Fenghua-Advanced-Tech-0603B391K500NT_C1617.html?s_z=n_390pF, LCSC PART=C1617
C17 C20: library part C, JLCPCB=C1713, lcsc link=https://www.lcsc.com/product-detail/Multilayer-Ceramic-Capacitors-MLCC-SMD-SMT_Samsung-Electro-Mechanics-CL21A106KOQNNNE_C1713.html?s_z=n_C1713, LCSC PART=C1713
C22: library part C, JLCPCB=C7503499, lcsc link=https://www.lcsc.com/product-detail/Multilayer-Ceramic-Capacitors-MLCC-SMD-SMT_HRE-CGA0603X7R472K500JT_C7503499.html, LCSC PART=C7503499
C23 C24: library part C, "50V 18pF X7R ±10% 0603 Multilayer Ceramic Capacitors MLCC - SMD/SMT ROHS", JLCPCB=C6119867, lcsc link=https://www.lcsc.com/product-detail/Multilayer-Ceramic-Capacitors-MLCC-SMD-SMT_HRE-CGA0603X7R104K500JT_C6119867.html, LCSC PART=C6119867
CARD1: "Card Slot MicroSD card (TF card) Flip type SMD SD Card / Memory Card Connector ROHS", JLCPCB=C125814, JLCPCB Part Class="Extended Part", LCSC Part Name="??? MicroSD?(TF?) ??", Manufacturer=SOFNG(??), Operating Temperature Range=-, Add into BOM=yes, Card Connection Mode="Flip type", Card Type="MicroSD card (TF card)", Connector Type="Card Slot", Convert to PCB=yes, Datasheet=https://atta.szlcsc.com/upload/public/pdf/source/20200313/C125814_E45762AFA89F96AEF2D8FC2220BDEE92.pdf, Device=TF-002X-H18, lcsc link=https://www.lcsc.com/product-detail/SD-Card-Memory-Card-Connector_SOFNG-TF-002X-H18_C125814.html?s_z=n_microsd, LCSC PART=C125814, Manufacturer Part=TF-002X-H18, Maximum Body Height=-, pdf=https://www.lcsc.com/datasheet/lcsc_datasheet_2410121543_SOFNG-TF-002X-H18_C125814.pdf, Supplier=LCSC, Supplier Footprint=SMD, Supplier Part=C125814, Symbol=TF-002-H18
D1 D17 D18 D19 D20: JLCPCB=C65010, Datasheet=https://www.smc-diodes.com/propdf/SK510%20N1113%20REV.A.pdf, lcsc link=https://www.lcsc.com/product-detail/Schottky-Diodes_MDD-Microdiode-Semiconductor-SS510_C65010.html, LCSC PART=C65010, MFN=SS510-HT, NAME="DIODE SCHOTTKY 100V 5A DO214AC", pdf=https://www.lcsc.com/datasheet/lcsc_datasheet_2411211954_MDD-Microdiode-Semiconductor-SS510_C65010.pdf, STOK KOD=HM0953, TYPE=SMD
D2: library part "DIODE TVS 600W 54V DO214AA SMB", "600W Bidirectional 54V SMB ESD and Surge Protection (TVS/ESD) ROHS", JLCPCB=C5353227, Datasheet=https://www.littelfuse.com/~/media/electronics/datasheets/tvs_diodes/littelfuse_tvs_diode_smbj_datasheet.pdf.pdf, lcsc link=https://www.lcsc.com/product-detail/ESD-and-Surge-Protection-TVS-ESD_FOSAN-SMBJ54CA_C5353227.html?s_z=n_SMBJ54CA, LCSC PART=C5353227, MFN=SMBJ54CA-HT, NAME="DIODE TVS 600W 54V DO214AA SMB", pdf=https://www.lcsc.com/datasheet/lcsc_datasheet_2301131609_FOSAN-SMBJ54CA_C5353227.pdf, STOK KOD=HM0531, TYPE=SMD
D3: library part B560C, "60V 700mV@5A 5A SMC(DO-214AB) Schottky Diodes ROHS", JLCPCB=C85100, lcsc link=https://www.lcsc.com/product-detail/Schottky-Diodes_Diodes-Incorporated-B560C-13-F_C85100.html?s_z=n_b560c, LCSC PART=C85100, pdf=https://www.lcsc.com/datasheet/lcsc_datasheet_2412251154_Diodes-Incorporated-B560C-13-F_C85100.pdf
D4: "5.5A@8/20us 230W 40V 25V 24V SOT-23 ESD and Surge Protection (TVS/ESD) ROHS", JLCPCB=C1976606, lcsc link=https://www.lcsc.com/product-detail/ESD-and-Surge-Protection-TVS-ESD_STMicroelectronics-ESDCAN01-2BLY_C1976606.html?s_z=n_C1976606, LCSC PART=C1976606, PAGE=DPESDCAN01, pdf=https://www.lcsc.com/datasheet/lcsc_datasheet_2410010332_STMicroelectronics-ESDCAN01-2BLY_C1976606.pdf
D5 D6 D7 D8 D9 D10 D11 D12 D13 D14 D15 D16 D21: library part 1N4148_KA, "1N4148_KA", JLCPCB=C84063, lcsc link=https://www.lcsc.com/product-detail/Switching-Diodes_Changzhou-Starsea-Elec-1N4148WS_C84063.html?s_z=n_1n4148, LCSC PART=C84063, pdf=https://www.lcsc.com/datasheet/lcsc_datasheet_1811021610_Changzhou-Starsea-Elec-1N4148WS_C84063.pdf
D22 D23: JLCPCB=C5310938, lcsc link=https://www.lcsc.com/product-detail/ESD-and-Surge-Protection-TVS-ESD_TECH-PUBLIC-TPD2E2U06QDCKR-TP_C5310938.html?s_z=n_TPD2E2U0, LCSC PART=C5310938, MFN=TPD2E2U06DCKR, NAME="Q100 TO CATALOG SPIN OF TPD2E2U0", pdf=https://www.lcsc.com/datasheet/lcsc_datasheet_2411121117_TECH-PUBLIC-TPD2E2U06QDCKR-TP_C5310938.pdf, STOK KOD=HM0072, TYPE=SMD
J1 J2: "4P 2.54mm Single Row 1x4P Plugin,P=2.54mm Pin Headers ROHS", JLCPCB=C5116483, lcsc link=https://www.lcsc.com/product-detail/Pin-Headers_ZHOURI-2-54-1-4_C5116483.html?s_z=n_C5116483, LCSC PART=C5116483, pdf=https://www.lcsc.com/product-detail/Pin-Headers_ZHOURI-2-54-1-4_C5116483.html?s_z=n_C5116483
L1: library part "FIXED IND 6.8UH 4.5A 60 MOHM SMD", "4.5A 6.8uH ±20% 8A SMD,6.5x6.9mm Power Inductors ROHS", JLCPCB=C506575, lcsc link=https://www.lcsc.com/product-detail/Power-Inductors_Vishay-Intertech-IHLP2525CZER6R8M01_C506575.html?s_z=n_IHLP2525CZER6R8M01, LCSC PART=C506575, MFN=IHLP2525CZER6R8M01, pdf=https://www.lcsc.com/datasheet/lcsc_datasheet_2409300703_Vishay-Intertech-IHLP2525CZER6R8M01_C506575.pdf, TYPE=SMD
L2: "51uH@100kHz 2.8k?@10MHz 1? 2 SMD,4.5x3.2mm Common Mode Filters ROHS", JLCPCB=C76584, lcsc link=https://www.lcsc.com/product-detail/Common-Mode-Filters_TDK-ACT45B-510-2P-TL003_C76584.html?s_z=n_C76584, LCSC PART=C76584, PAGE=L51UHACT45B, pdf=https://www.lcsc.com/datasheet/lcsc_datasheet_2412231058_TDK-ACT45B-510-2P-TL003_C76584.pdf
P2 P3: library part "Header 16", "3.5mm 1x16P -60?~+105? 16P Gray 16 1 Plugin,P=3.5mm Spring Clamp System Terminal Block", JLCPCB=C2833595, LatestRevisionDate=17-Jul-2002, LatestRevisionNote="Re-released for DXP Platform.", lcsc link=https://www.lcsc.com/product-detail/Spring-Clamp-System-Terminal-Block_WAGO-250-216_C2833595.html, LCSC PART=C2833595, pdf=https://www.lcsc.com/datasheet/lcsc_datasheet_2410121253_WAGO-250-216_C2833595.pdf, Publisher="Altium Limited"
P4: library part MAX31865_board, "MAX31865_board", LatestRevisionDate=17-Jul-2002, LatestRevisionNote="Re-released for DXP Platform.", Publisher="Altium Limited"
R1 R2: library part R, JLCPCB=C114633, lcsc link=https://www.lcsc.com/product-detail/Chip-Resistor-Surface-Mount_YAGEO-RC0603FR-0768KL_C114633.html?s_z=n_68K, LCSC PART=C114633
R3 R6 R7: library part R, JLCPCB=C23058, lcsc link=https://www.lcsc.com/product-detail/Chip-Resistor-Surface-Mount_UNI-ROYAL-Uniroyal-Elec-0603WAF4532T5E_C23058.html, LCSC PART=C23058
R4: library part R, JLCPCB=C114659, lcsc link=https://www.lcsc.com/product-detail/Chip-Resistor-Surface-Mount_YAGEO-RC0603FR-0712KL_C114659.html?s_z=n_12k, LCSC PART=C114659
R5 R13 R37 R41 R43 R45 R46: library part R
R8 R9: library part R, "100mW Thick Film Resistors 75V ±100ppm/? ±1% 60.4? 0603 Chip Resistor - Surface Mount ROHS", JLCPCB=C23090, lcsc link=https://www.lcsc.com/product-detail/Chip-Resistor-Surface-Mount_UNI-ROYAL-Uniroyal-Elec-0603WAF604JT5E_C23090.html?s_z=n_60.4R, LCSC PART=C23090
R10 R15 R18 R19 R24 R25: library part R, JLCPCB=C23186, lcsc link=https://www.lcsc.com/product-detail/Chip-Resistor-Surface-Mount_UNI-ROYAL-Uniroyal-Elec-0603WAF5101T5E_C23186.html, LCSC PART=C23186
R11 R16 R20 R21 R26 R27 R30 R31 R32 R33 R35 R36 R40 R49: library part R, JLCPCB=C2907123, lcsc link=https://www.lcsc.com/product-detail/Chip-Resistor-Surface-Mount_FOJAN-FRC0603J201-TS_C2907123.html, LCSC PART=C2907123
R12 R17 R22 R23 R28 R29 R34 R38 R44 R47 R48 R50 R51 R55: library part R, JLCPCB=C25804, lcsc link=https://www.lcsc.com/product-detail/Chip-Resistor-Surface-Mount_UNI-ROYAL-Uniroyal-Elec-0603WAF1002T5E_C25804.html, LCSC PART=C25804
R14 R39 R42: library part R, JLCPCB=C15402, lcsc link=https://www.lcsc.com/product-detail/Chip-Resistor-Surface-Mount_UNI-ROYAL-Uniroyal-Elec-0603WAJ0000T5E_C15402.html, LCSC PART=C15402
R52 R53 R54: library part R, "100mW Thick Film Resistors 75V ±100ppm/? ±1% 33? 0603 Chip Resistor - Surface Mount ROHS", JLCPCB=C23140, lcsc link=https://www.lcsc.com/product-detail/Chip-Resistor-Surface-Mount_UNI-ROYAL-Uniroyal-Elec-0603WAF330JT5E_C23140.html, LCSC PART=C23140
U1: library part DPT_Walter
U2: library part "IC REG BUCK ADJUSTABLE 3A 8SOPWR", "Step-down type Adjustable 800mV~50V 3A 4.3V~60V SOIC-8-EP DC-DC Converters ROHS", JLCPCB=C90665, Datasheet=https://www.ti.com/general/docs/suppproductinfo.tsp?distId=10&gotoUrl=https%3A%2F%2Fwww.ti.com%2Flit%2Fgpn%2Flmr16030, lcsc link=https://www.lcsc.com/product-detail/DC-DC-Converters_Texas-Instruments-LMR16030PDDAR_C90665.html?s_z=n_LMR16030PDDAR, LCSC PART=C90665, MFN=LMR16030PDDAR, NAME="IC REG BUCK ADJUSTABLE 3A 8SOPWR", pdf=https://www.lcsc.com/datasheet/lcsc_datasheet_2410121701_Texas-Instruments-LMR16030PDDAR_C90665.pdf, STOK KOD=HM0056, TYPE=SMD
U3: library part LPS22HBTR, "26Kpa~126Kpa HLGA-10(2x2) Pressure Sensors ROHS", JLCPCB=C2827824, lcsc link=https://www.lcsc.com/product-detail/Pressure-Sensors_STMicroelectronics-LPS22HHTR_C2827824.html, LCSC PART=C2827824, pdf=https://www.lcsc.com/datasheet/lcsc_datasheet_2209222100_STMicroelectronics-LPS22HHTR_C2827824.pdf
U4: JLCPCB=C94048, lcsc link=https://www.lcsc.com/product-detail/Accelerometers_STMicroelectronics-LSM6DSMTR_C94048.html?s_z=n_C94048, LCSC PART=C94048, pdf=https://www.lcsc.com/datasheet/lcsc_datasheet_1811101102_STMicroelectronics-LSM6DSMTR_C94048.pdf
U5: library part HDC1080, JLCPCB=C82227, lcsc link=https://www.lcsc.com/product-detail/Temperature-and-Humidity-Sensor_Texas-Instruments-HDC1080DMBR_C82227.html?s_z=n_C82227, LCSC PART=C82227, pdf=https://www.ti.com/lit/ds/symlink/hdc1080.pdf?ts=1737300187160&ref_url=https%253A%252F%252Fwww.google.com%252F
U7: library part AP22802A, "2.5V~5.5V 60m? Active High 2A 1 Load Switch SOT-23-5 Power Distribution Switches ROHS", JLCPCB=C111830, lcsc link=https://www.lcsc.com/product-detail/Power-Distribution-Switches_Silergy-Corp-SY6288CAAC_C111830.html, LCSC PART=C111830, pdf=https://www.lcsc.com/datasheet/lcsc_datasheet_1810010210_Silergy-Corp-SY6288CAAC_C111830.pdf
U8: JLCPCB=C2671361, lcsc link=https://www.lcsc.com/product-detail/RS-485-RS-422-ICs_Texas-Instruments-THVD1450DR_C2671361.html?s_z=n_C2671361, LCSC PART=C2671361, pdf=https://www.ti.com/lit/ds/symlink/thvd1450.pdf?HQS=dis-dk-null-digikeymode-dsf-pf-null-wwe&ts=1737388582157&ref_url=https%253A%252F%252Fwww.ti.com%252Fgeneral%252Fdocs%252Fsuppproductinfo.tsp%253FdistId%253D10%2526gotoUrl%253Dhttps%253A%252F%252Fwww.ti.com%252Flit%252Fgpn%252Fthvd1450
U9: JLCPCB=C115764, lcsc link=https://www.lcsc.com/product-detail/CAN-Transceivers_Texas-Instruments-SN65HVDA1050AQDRQ1_C115764.html?s_z=n_C115764, LCSC PART=C115764, PAGE=ICSN65HVDA1050A, pdf=https://www.lcsc.com/datasheet/lcsc_datasheet_2410010301_Texas-Instruments-SN65HVDA1050AQDRQ1_C115764.pdf
U10: library part ADS1015IDGSR, "12-Bit, 3.3kSPS, 4-Ch Delta-Sigma ADC With PGA, Oscillator, VREF, Comparator and I2C Interface 10-VSSOP -40 to 125", JLCPCB=C37593, lcsc link=https://www.lcsc.com/product-detail/Analog-to-Digital-Converters-ADC_Texas-Instruments-ADS1115IDGSR_C37593.html?s_z=n_ADS1115IDGSR, LCSC PART=C37593, pdf=https://www.lcsc.com/datasheet/lcsc_datasheet_1809192322_Texas-Instruments-ADS1115IDGSR_C37593.pdf
U11 U12 U13 U14: "1.32V 60V 180m? 1A SOP-4 Solid State Relays (MOS Output) ROHS", Continuous Load Current=1A, Input Forward Voltage=1.32V, Isolation Voltage(rms)=2.5kV, JLCPCB=C19271988, JLCPCB Part Class="Extended Part", LCSC Part Name=?????, Manufacturer=SUPSiC(??????), On Resistance=180m?, Voltage - Load=60V, Add into BOM=yes, Convert to PCB=yes, Datasheet=https://atta.szlcsc.com/upload/public/pdf/source/20241011/A89ED24ACAE58F7B7A4718E65AC52A14.pdf, Device=GAQY212GSX, lcsc link=https://www.lcsc.com/product-detail/Solid-State-Relays-MOS-Output_SUPSiC-GAQY212GSX_C19271988.html, LCSC PART=C19271988, Load Type=-, Manufacturer Part=GAQY212GSX, pdf=https://www.lcsc.com/datasheet/lcsc_datasheet_2411220035_SUPSiC-GAQY212GSX_C19271988.pdf, Relay Contact Form=-, Supplier=LCSC, Supplier Footprint=SOP-4, Supplier Part=C19271988, Symbol=GAQY212GSX, Turn-off time=100us, Turn-on time=350us
U15: "16-Bit I/O Expander with Serial Interface", Clock Frequency=-, JLCPCB=C558584, JLCPCB Part Class="Extended Part", LCSC Part Name=16???????I/O???, Manufacturer=MICROCHIP(????), Operating Temperature=-40?~+125?, Supply Voltage=1.8V~5.5V, Add into BOM=yes, Convert to PCB=yes, Datasheet=https://atta.szlcsc.com/upload/public/pdf/source/20221209/1BF939F88C2D907BC056D7BF485E3103.pdf, Device=MCP23017T-E/SS, Interrupt Output="With Interrupt Output", lcsc link=https://www.lcsc.com/product-detail/I-O-Expanders_Microchip-Tech-MCP23017T-E-SS_C558584.html?s_z=n_MCP23017, LCSC PART=C558584, Manufacturer Part=MCP23017T-E/SS, Number of I/O=16, Output Sink Current=-, Output Source current=-, pdf=https://www.lcsc.com/datasheet/lcsc_datasheet_2410122007_Microchip-Tech-MCP23017T-E-SS_C558584.pdf, Supplier=LCSC, Supplier Footprint=SSOP-28, Supplier Part=C558584, Symbol=MCP23017T-E/SS
U16: "Low-Power Dual Operational Amplifier", JLCPCB=C5423, Code_IPC=SOIC127P600-8, Code_JEDEC=MS-012-AA, ComponentLink1Description="Manufacturer Link", ComponentLink1URL=http://www.st.com/, ComponentLink2Description=Datasheet, ComponentLink2URL=http://www.st.com/stonline/products/literature/ds/2163/lm358.pdf, DatasheetVersion=Jun-1998, LatestRevisionDate=13-Apr-2006, LatestRevisionNote="IPC-7351 Footprint Added.", lcsc link=https://www.lcsc.com/product-detail/Operational-Amplifier_Texas-Instruments-LM358DR_C5423.html?s_z=n_lm358, LCSC PART=C5423, PackageDescription="8-Pin Small Outline Integrated Circuit 1.27 mm Pitch", PackageReference=SO8, PackageVersion=Dec-2002, pdf=https://www.lcsc.com/datasheet/lcsc_datasheet_1810181640_Texas-Instruments-LM358DR_C5423.pdf, Published=24-Aug-2001, Publisher="Altium Limited"

## Free pads (board coordinates)
  round 6 hole 3.5: 1(72.25,4.75) 2(4.25,4.75) 3(4.25,104.75) 4(72.25,104.75) 5(72.25,54.75)
  rrect50% 2x2 hole 1: 6(51.308,47.498) 6(69.038,44.829) 6(74.676,48.26) 7(73.835,12.916)

## Via types
v1: diameter 0.8, hole 0.4, Component Side to Solder Side, tented both sides, 332 vias

## Nets (pads, with @x,y where several pads share a name; then routed paths per layer and width w, separated by ;. In a path a pad name is that pad's centre, name@x,y a point inside that pad or via, vN(x,y) a via of type N, cw(c..) or ccw(c..) an arc to the next point about the centre after c; other vN are vias at no path point)
anAdc0: R26.2 U10.4 | length 8
  Component Side w0.254: U10.4@32.834,84.09 37.178,84.09 39.066,85.977 R26.2@39.066,86.93
anAdc1: R20.2 U10.5 | length 3.6
  Component Side w0.254: U10.5@32.834,84.59 33.978,85.734 R20.2@33.978,86.93 ; 33.986,85.977 R20.2@33.986,86.803
anAdc2: R11.2 U10.6 | length 4.9
  Component Side w0.254: R11.2@25.35,86.93 25.35,85.641 26.401,84.59 U10.6@28.534,84.59
anAdc3: R16.2 U10.7 | length 4
  Component Side w0.254: U10.7@28.534,84.09 29.558,84.09 29.922,84.453 R16.2@29.922,86.93
CAN_ENB: R55.1 U1.17 U7.4 | length 12.7
  Component Side w0.508: R55.1@14.414,20.574 14.51,20.669 v1(14.51,21.431) U7.4@14.51,22.291
  Solder Side w0.508: U1.17@11.38,30.097 11.38,22.91 12.859,21.431 v1(14.51,21.431)
CAN_H: C23.1 D4.2 L2.1 P2.16 R8.1 | length 16.9
  Component Side w0.508: R8.1@2.236,13.841 v1(1.601,13.206) 1.601,12.952 C23.1@2.236,12.317 2.687,11.866 D4.2@3.953,11.866 3.953,13.516 L2.1@3.653,13.816
  Solder Side w0.508: v1(1.601,13.206) 2.49,14.095 11.696,14.095 P2.16@12,13.791
CAN_L: C24.1 D4.1 L2.2 P2.15 R9.1 | length 15.3
  Component Side w0.508: L2.2@6.153,13.816 5.853,13.516 D4.1@5.853,11.866 7.246,11.866 C24.1@7.57,12.19 8.332,12.952 v1(8.332,13.206) 7.697,13.841 R9.1@7.57,13.841
  Solder Side w0.508: v1(8.332,13.206) 12.748,8.791 P2.15@15.5,8.791
CAN_RX: U1.15 U9.4 | length 6
  Component Side w0.254: U9.4@2.998,25.677 2.998,27.14 5.955,30.097 U1.15@6.3,30.097
CAN_TX: U1.16 U9.1 | length 5.3
  Component Side w0.254: U9.1@6.808,25.677 6.808,26.795 8.84,28.827 U1.16@8.84,30.097
DrvLedOut0: R35.1 U15.1 | length 29.4
  Component Side w0.254: R35.1@2.617,79.437 2.617,74.928 7.57,69.975 14.507,69.975 19.093,65.389 U15.1@19.093,60.932
DrvLedOut1: R36.1 U15.2 | length 28.4
  Component Side w0.254: R36.1@4.014,79.437 4.014,75.309 8.586,70.737 14.428,70.737 19.743,65.422 U15.2@19.743,60.932
DrvOptoOut0: R33.1 U15.21 | length 5.7
  Component Side w0.254: R33.1@23.318,73.405 23.318,71.88 23.643,71.555 U15.21@23.643,67.842
DrvOptoOut1: R32.1 U15.22 | length 8.8
  Component Side w0.254: R32.1@18.492,73.405 20.777,73.405 22.993,71.189 U15.22@22.993,67.842
DrvOptoOut2: R31.1 U15.23 | length 12.6
  Component Side w0.254: R31.1@13.666,73.405 14.936,72.134 20.778,72.134 22.343,70.569 U15.23@22.343,67.842
DrvOptoOut3: R30.1 U15.24 | length 16.4
  Component Side w0.254: R30.1@8.817,73.405 10.786,71.436 20.206,71.436 21.693,69.949 U15.24@21.693,67.842
EXT_ADC0: P3.9 R24.1 | length 9.7
  Component Side w0.254: R24.1@39.066,91.375 39.066,94.613 40,95.547 P3.9@40,100.709
EXT_ADC1: P3.8 R18.1 | length 5.4
  Component Side w0.254: R18.1@33.978,91.375 33.978,93.187 P3.8@36.5,95.709
EXT_ADC2: P3.7 R15.1 | length 10.6
  Component Side w0.254: R15.1@29.906,91.375 29.906,92.565 33,95.659 P3.7@33,100.709
EXT_ADC3: P3.6 R10.1 | length 5.5
  Component Side w0.254: R10.1@26.62,91.375 26.62,92.777 29.5,95.657 P3.6@29.5,95.709